# EAGLE board ELdrv (EAGLE 9.5.1)
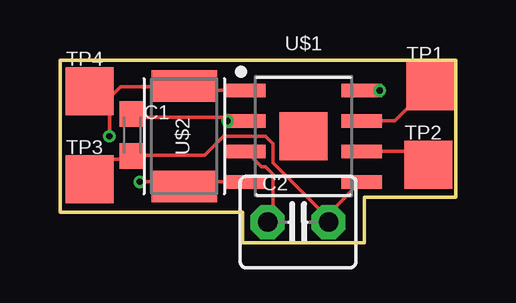
[diagram p0: board, top side]
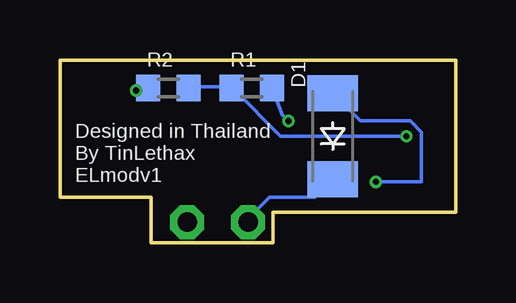
[diagram p1: board, bottom side, seen from below]

Size 16.51 x 7.62 mm. Coordinates in mm from the lower left corner, seen from the top.
Outline: 0,7.62 16.51,7.62 16.51,1.91 12.7,1.91 12.7,0 7.62,0 7.62,1.27 0,1.27 0,7.62
Copper layers (1*16): Top 0.035559375mm / dielectric 1.6mm / Bottom 0.035559375mm
Design rules "oshpark-2layer": minimum track width 6mil, minimum drill 10mil, track to track 6mil, track to pad 6mil, pad to pad 6mil, via to via 6mil, smd to smd 6mil, copper to edge 15mil, drill to drill 6mil, minimum pad ring 5mil, minimum via ring 5mil, stop-mask expansion 2.5mil, vias tented up to drill 0mil, thermal gap 10mil

## Footprints (pad centres in the part's own frame; a part is rotated, then mirrored left to right if it is on the bottom)
C0603K = smd 1.05 x 1.08: 1 -0.875,0; 2 0.875,0
C025-040X050 = drill 0.813 pad 1.422 octagon: 1 -1.27,0; 2 1.27,0
SOD-123_MINI-SMA = smd 1.5 x 2.1: A 1.8,0; C -1.8,0
R0603 = smd 1 x 1.1: 1 -0.85,0; 2 0.85,0
TP20SQ = smd 2 x 2: TP 0,0
SOIC127P600X175-9T200L = smd 1.669 x 0.559: 1 -2.423,1.905; 2 -2.423,0.635; 3 -2.423,-0.635; 4 -2.423,-1.905; 5 2.423,-1.905; 6 2.423,-0.635; 7 2.423,0.635; 8 2.423,1.905 | smd 2 x 2: 9 0,0
INDC4526X50N = smd 1.314 x 2.729: 1 -2.098,0; 2 2.098,0

## Placement (x,y rotation side)
C1  1nF 16V  [C0603K]  3.02,4.5 270 top
C2  0.01uF 100V  [C025-040X050]  9.93,0.86 0 top
D1  1N4148  [SOD-123_MINI-SMA]  5.13,4.45 90 bottom
R1  [R0603]  8.51,6.45 0 bottom
R2  [R0603]  11.99,6.45 0 bottom
TP1  TPSQTP20SQ  [TP20SQ]  15.44,6.53 0 top
TP2  TPSQTP20SQ  [TP20SQ]  15.37,3.25 0 top
TP3  TPSQTP20SQ  [TP20SQ]  1.24,2.64 0 top
TP4  TPSQTP20SQ  [TP20SQ]  1.24,6.32 0 top
U$1  HV823  [SOIC127P600X175-9T200L]  10.16,4.45 0 top
U$2  NL453232T-561J-PF  [INDC4526X50N]  5.18,4.45 90 top

## Library data of the parts
C1 C2 R1 R2 = adafruit
D1 = diode
TP1-TP4 = testpad
U$1 = HV823; PACKAGE: 8-SOIC; PARTNO: HV823
U$2 = 561J-PF

## Nets
N$1: D1.A U$1.4 U$2.1
N$2: C2.1 D1.C U$1.3
N$3: R1.1 R2.2 TP4.TP U$1.1 U$2.2
N$4: C1.1 R1.2 U$1.2
N$5: R2.1 U$1.8
N$6: C1.2 C2.2 TP3.TP U$1.5
N$7: TP1.TP U$1.7
N$8: TP2.TP U$1.6

## Tracks (layer width: path | path; a pad name or v marks a point on that pad's centre or on a via)
N$1  (via drill 0.25)
  Top 0.152: 5.4,2.54 U$1.4 | 5.4,2.54 5.24,2.38 U$2.1 5.4,2.54 | 5.4,2.54 v3.33,2.54
  Bottom 0.152: v3.33,2.54 1.43,2.54 1.43,4.6 1.91,5.08 3.97,5.08 5.08,6.19 D1.A
N$2
  Top 0.152: U$1.3 7.78,3.81 8.41,3.17 8.57,3.17 8.89,2.86 8.89,1.11 8.73,0.95 C2.1
  Bottom 0.152: D1.C 5.24,2.54 5.87,1.91 7.78,1.91 8.73,0.95 C2.1
N$3  (via drill 0.25)
  Top 0.152: U$1.1 5.4,6.35 5.24,6.51 U$2.2 5.08,6.51 2.54,6.51 1.75,5.72 | v2.06,4.45 2.06,5.4 1.75,5.72 | 1.75,5.72 1.27,6.19 TP4.TP 1.75,5.72
  Bottom 0.152: R2.2 11.11,6.51 9.37,6.51 R1.1 9.21,6.35 7.3,4.45 v2.06,4.45
N$4  (via drill 0.25)
  Top 0.152: 6.99,5.24 7.46,5.24 7.62,5.08 U$1.2 | 6.99,5.24 3.17,5.24 C1.1 | 6.99,5.24 v6.99,5.08
  Bottom 0.152: v6.99,5.08 7.22,5.32 R1.2
N$5  (via drill 0.25)
  Top 0.152: U$1.8 v13.34,6.35
  Bottom 0.152: v13.34,6.35 12.86,6.35 R2.1
N$6
  Top 0.152: TP3.TP 1.27,2.7 2.06,3.49 3.02,3.49 C1.2 3.17,3.65 6.03,3.65 6.83,4.45 8.57,4.45 8.89,4.13 8.89,3.33 11.27,0.95 | 11.27,0.95 11.27,1.27 12.54,2.54 U$1.5 | 11.27,0.95 C2.2
N$7
  Top 0.152: U$1.7 13.97,5.08 15.4,6.51 TP1.TP
N$8
  Top 0.152: U$1.6 14.76,3.81 15.24,3.33 TP2.TP

## Text on the board
bNames: Designed in Thailand / By TinLethax / ELmodv1